# Altium PCB PCB1.PcbDoc
Units mm, origin at the board's own origin, x right, y up, seen from the top; angles counter-clockwise.
Board outline 34.5 x 33.25 mm, 4 copper layers (SIGNAL 1, Int1 (GND), Int2 (GND), SIGNAL 2), stack 1.57 mm thick; 35 components, 28 nets, 169 pads, 124 vias.
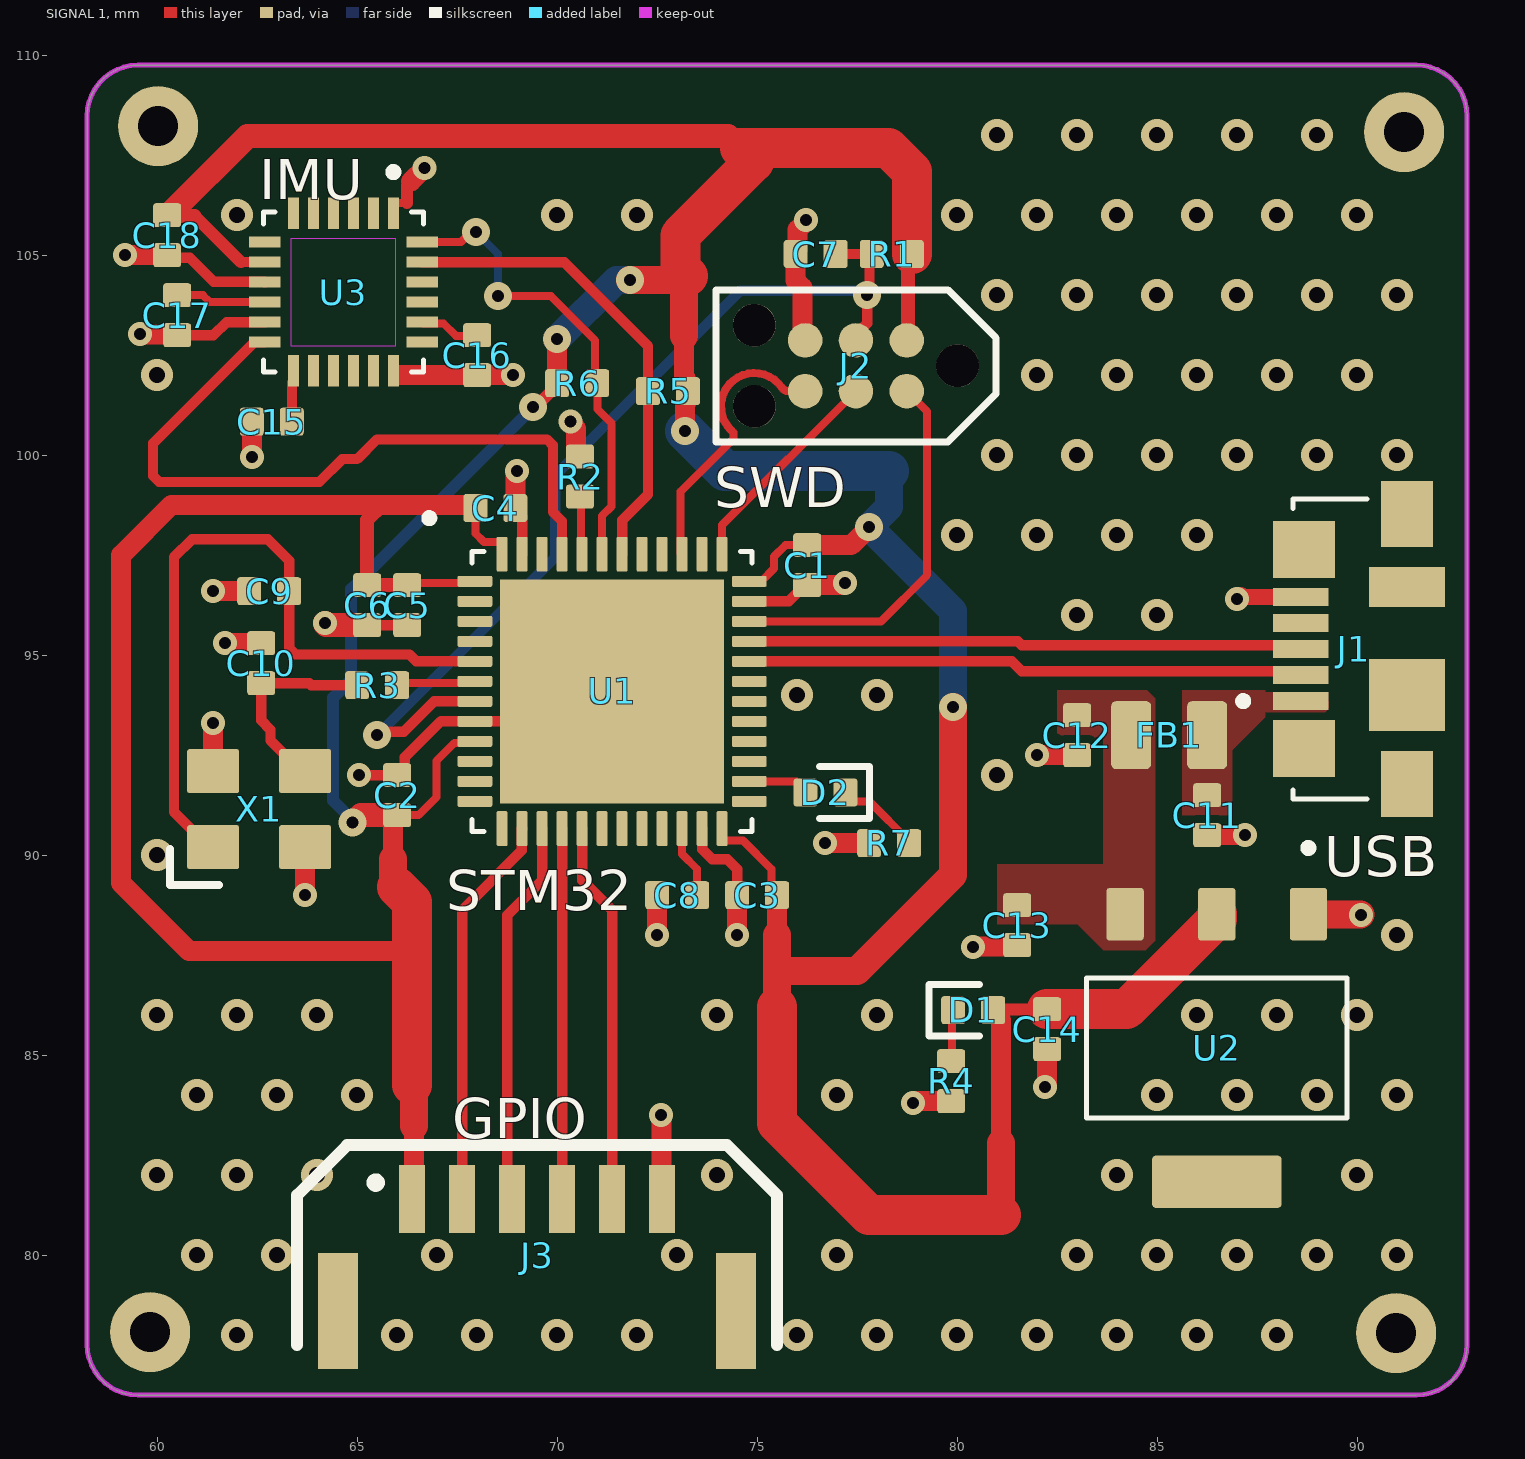
[diagram p0: SIGNAL 1 view]
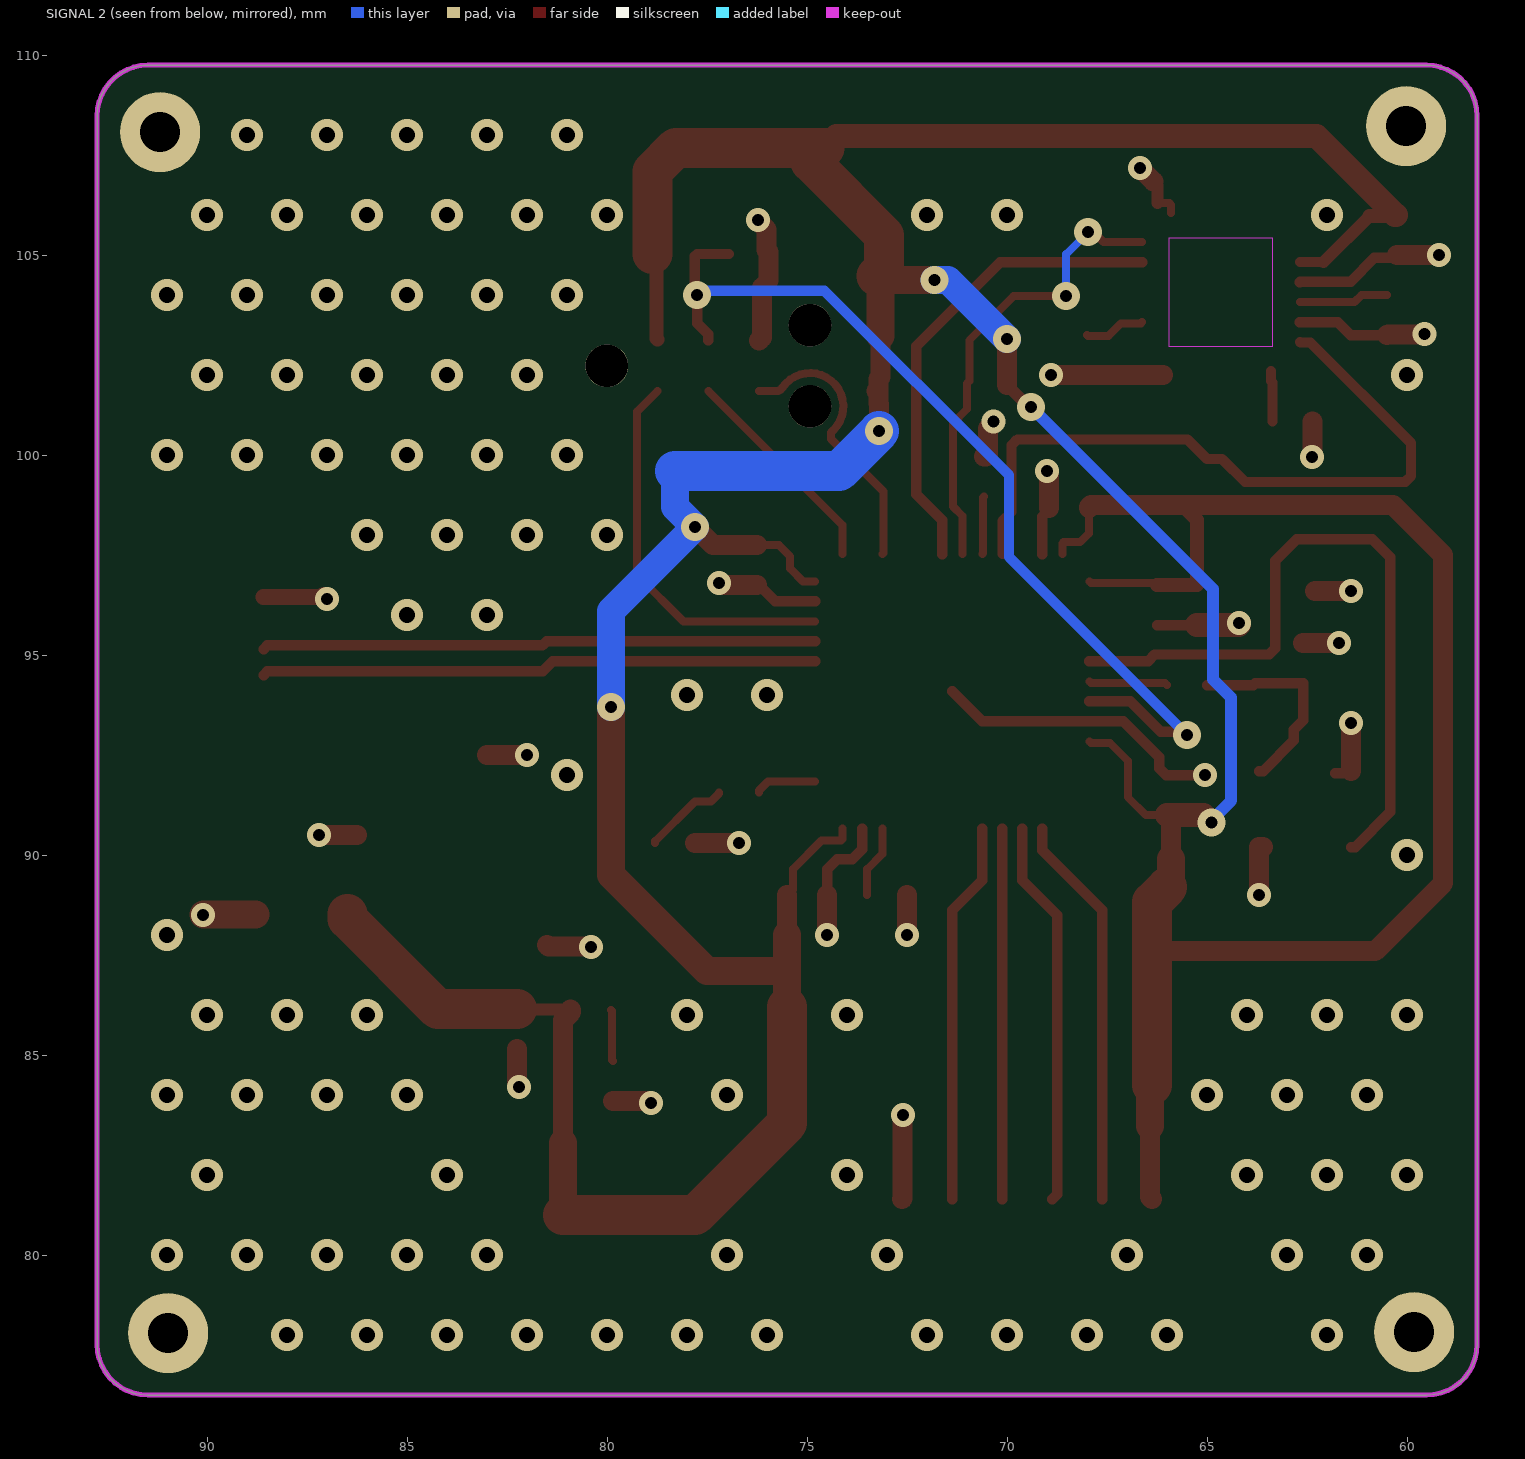
[diagram p1: SIGNAL 2 view, seen from below]
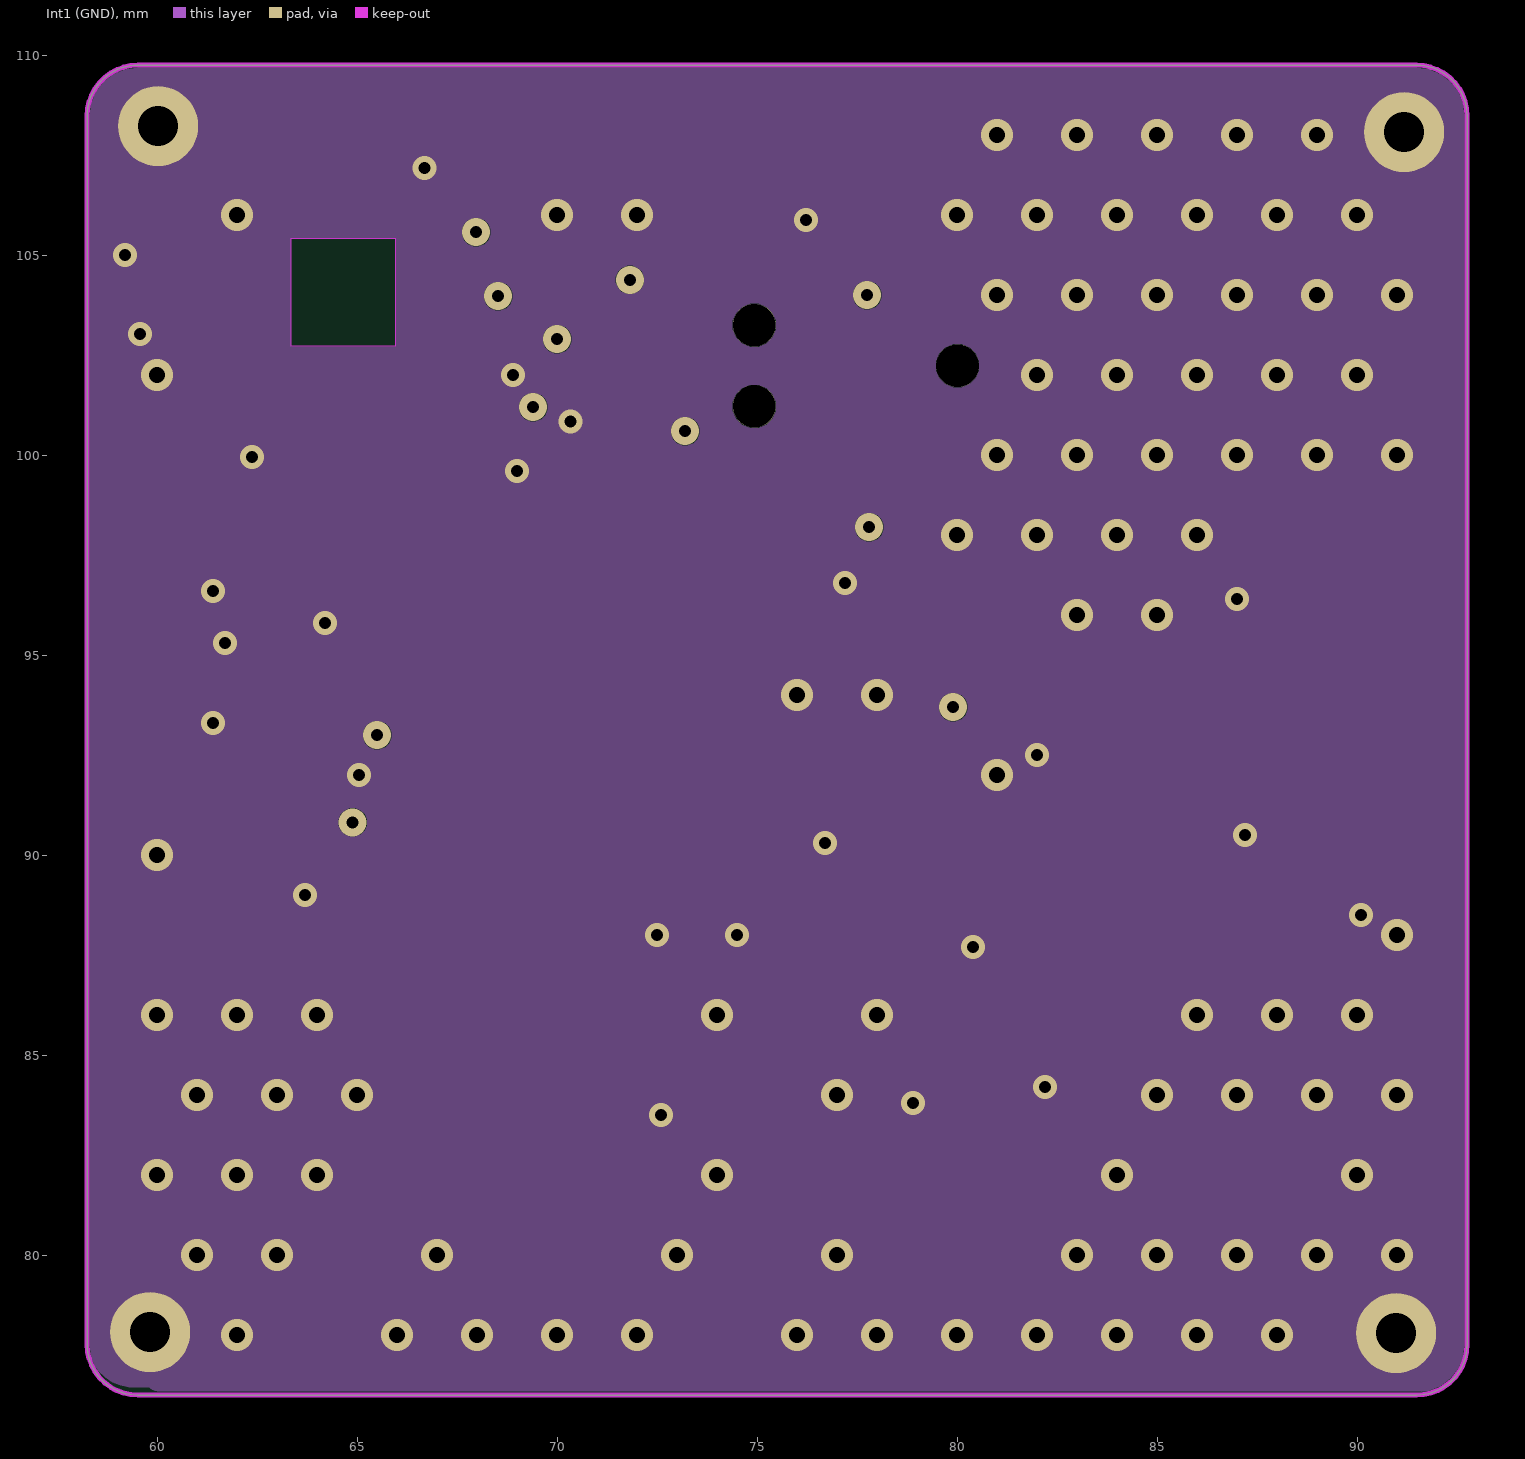
[diagram p2: Int1 (GND)]
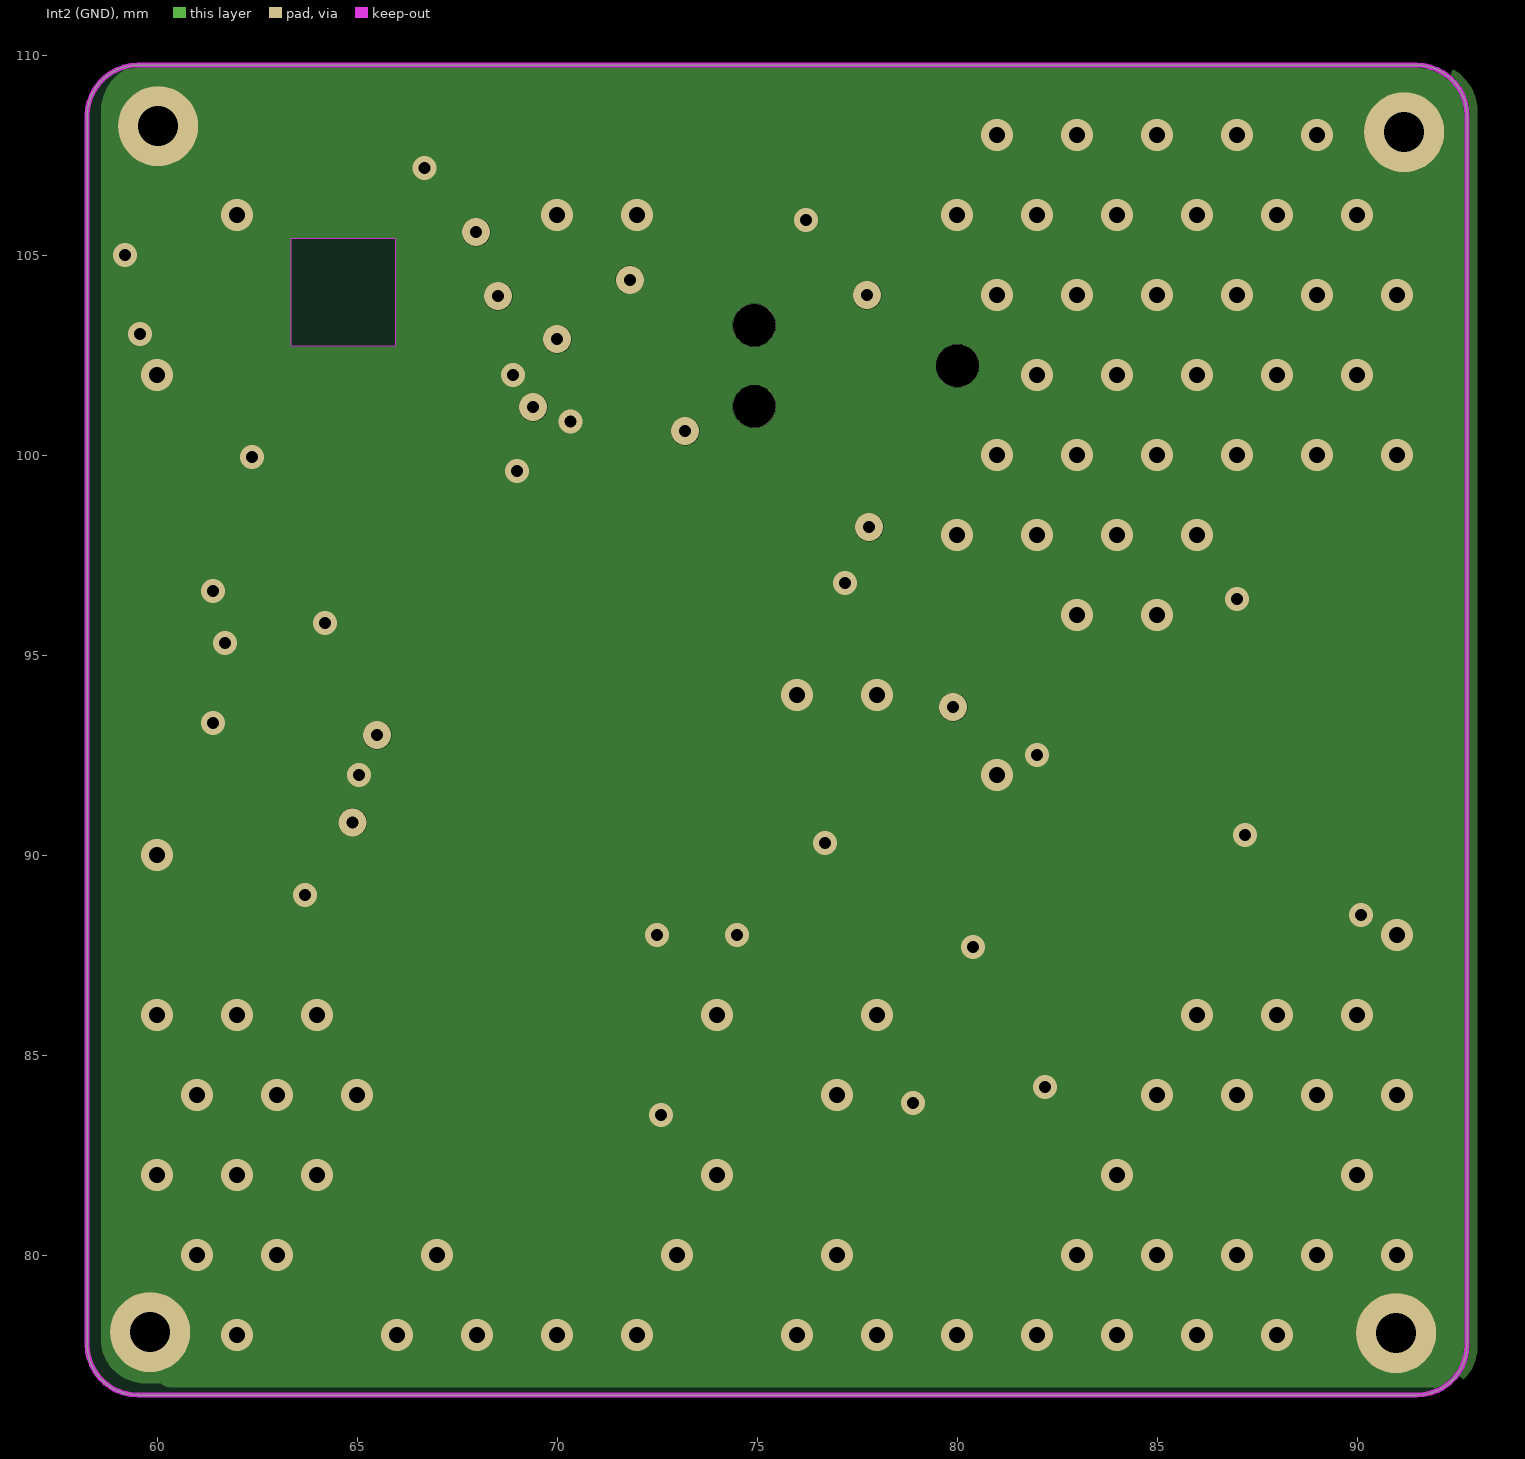
[diagram p3: Int2 (GND)]
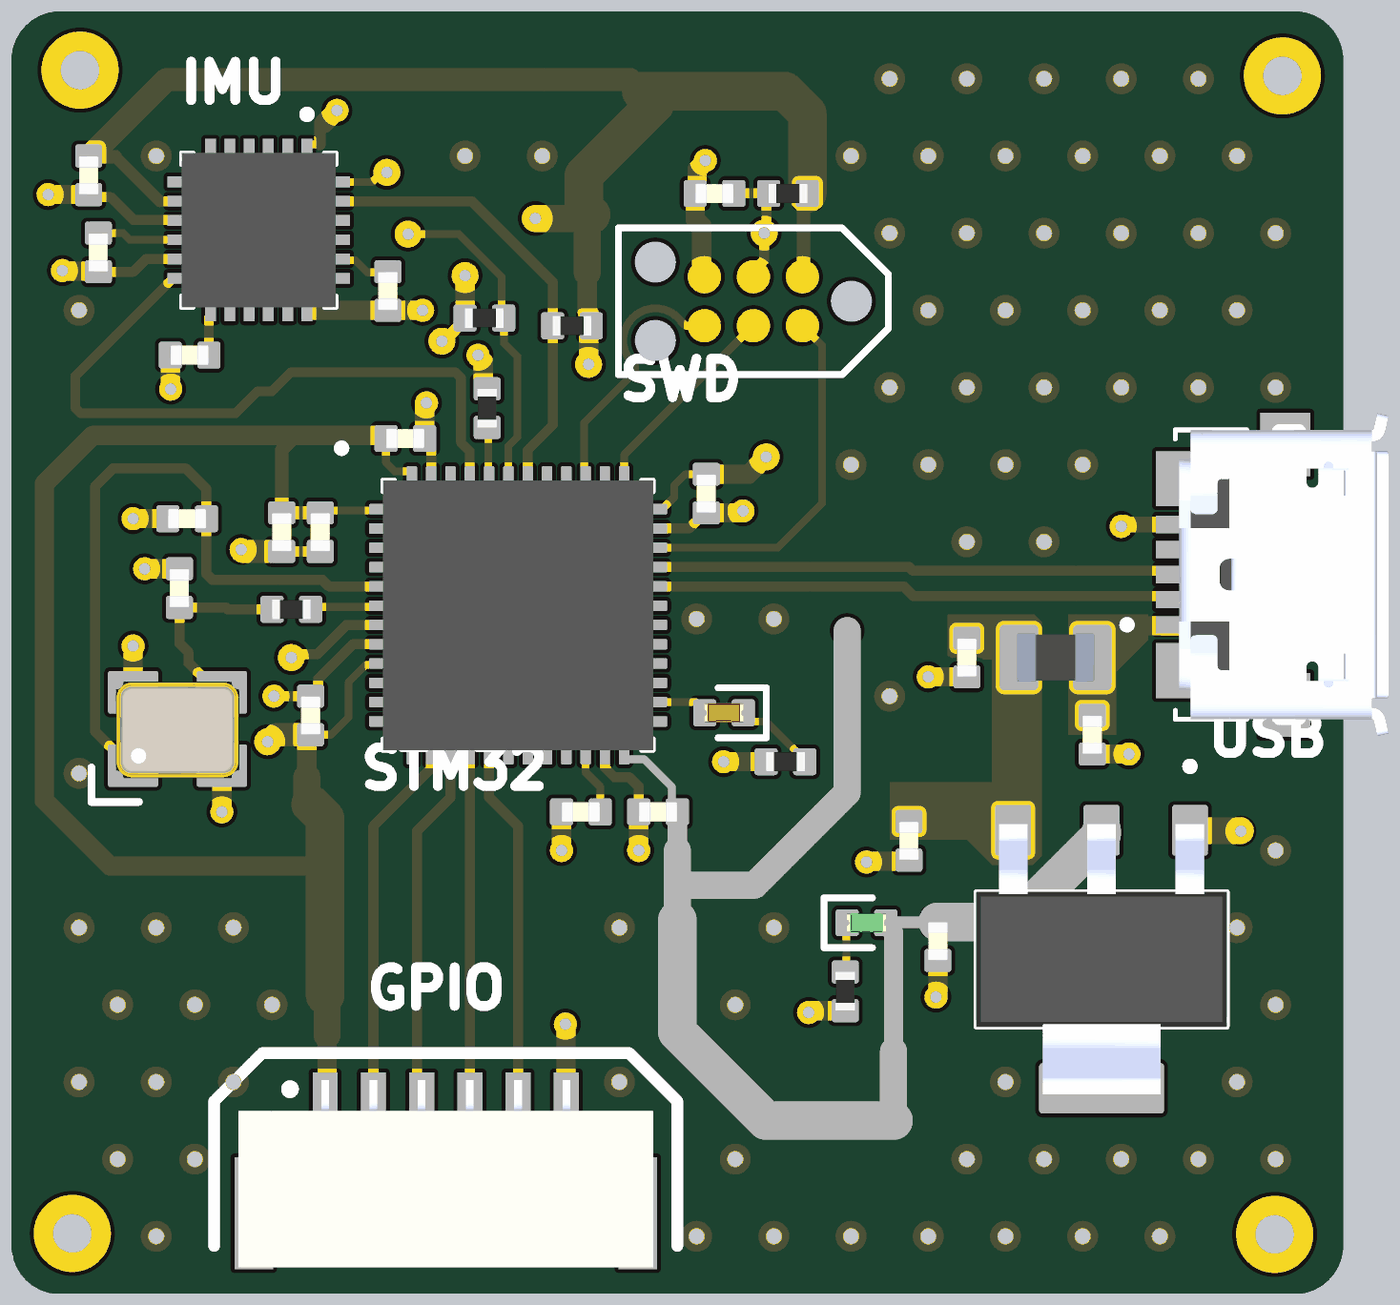
[diagram p4: 3D render of the assembled board from above, using the file's embedded part models]

## Layer stack, top to bottom
Top Solder: solder mask 0.0254, SM-001, Dk 4
SIGNAL 1: signal copper 0.035
Dielectric 2: prepreg 0.2, PP-017, Dk 4.6
Int1 (GND): signal copper 0.0175
Dielectric 3: core 1.065, Core-039, Dk 4.6
Int2 (GND): signal copper 0.0175
Dielectric 4: prepreg 0.2, PP-017, Dk 4.6
SIGNAL 2: signal copper 0.035
Bottom Solder: solder mask 0.0254, SM-001, Dk 4

## Board outline
58.25,77.77 58.25,108.48 cw(c59.52,108.48) 59.52,109.75 91.48,109.75 cw(c91.48,108.48) 92.75,108.48 92.75,77.77 cw(c91.48,77.77) 91.48,76.5 59.52,76.5 cw(c59.52,77.77)

## Design rules (kind name [scope] priority, off if disabled: settings)
Clearance [All] p1: gap=0.001 ignorepadtopadclearanceinfootprint=FALSE
DiffPairsRouting [All] p1: maxlimit=0.254 minlimit=0.203 mostfreqgap=0.254 toplayer_maxgap=0.203 toplayer_prefgap=0.203 toplayer_minwidth=0.26 toplayer_maxwidth=0.26 toplayer_prefwidth=0.26 bottomlayer_maxgap=0.203 bottomlayer_prefgap=0.203 bottomlayer_minwidth=0.26 bottomlayer_maxwidth=0.26 bottomlayer_prefwidth=0.26 impedanceprofiledriven=TRUE impedanceprofileid={E10362C9-FD98-41E2-AF1A-DACD84C4998A} impedanceprofilevalue=90.000000 maxuncoupledlength=12.7
PolygonConnect [All] p1: connectstyle=Direct reliefconductorwidth=0.254 reliefentries=4 polygonreliefangle="90 Angle" airgapwidth=0.254
RoutingVias [All] p1: holewidth=0.3 width=0.7 viastyle="Through Hole" minholewidth=0.25 minwidth=0.55 maxholewidth=0.4 maxwidth=0.9
SolderMaskExpansion [All] p1: expansion=0.102 istentingtop=FALSE
UnRoutedNet [All] p1: checkbadconnections=TRUE
Width [All] p1: maxlimit=1 minlimit=0.01 preferedwidth=0.01 midlayer1_maxwidth=0.01 midlayer2_maxwidth=0.01 minimp=50.000000 maximp=50.000000 favimp=50.000000
28 further rules are at their usual default settings.

## Classes and differential pairs
differential pair class DIFF_USB: USB_D
differential pair USB_D: +USB_D_P -USB_D_N

## Components (designator, comment, footprint, x,y, rotation, side; value= is the part's Value field where it differs from the comment)
C1 "100n" CAP_0402 76.25,97.25 r90 top
C2 "100n" CAP_0402 66,91.5 r270 top
C3 "100n" CAP_0402 75,89 r0 top
C4 "100n" CAP_0402 68.453,98.679 r180 top
C5 "100n" CAP_0402 66.25,96.25 r90 top
C6 "2u2" CAP_0402 65.25,96.25 r90 top
C7 "100n" CAP_0402 76.462,105.029 r0 top
C8 "2u2" CAP_0402 73,89 r0 top
C9 "10p" CAP_0402 62.8,96.6 r0 top
C10 "10p" CAP_0402 62.6,94.8 r270 top
C11 "2u2" CAP_0402 86.25,91 r270 top
C12 "2u2" CAP_0402 83,93 r270 top
C13 "22u" CAP_0402 81.5,88.25 r90 top
C14 "22u" CAP_0402 82.25,85.65 r90 top
C15 "100n" CAP_0402 62.865,100.838 r0 top
C16 "100n" CAP_0402 68,102.5 r90 top
C17 "10n" CAP_0402 60.5,103.5 r90 top
C18 "2n2" CAP_0402 60.25,105.5 r90 top
D1 "GREEN" LED_0402_GREEN 80.4,86.125 r180 top
D2 "RED" LED_0402_RED 76.708,91.567 r0 top
FB1 "120R" FB_0805 85.3,93 r180 top
J1 "47346-0001" MOLEX_47346-0001 91.25,95.15 r90 top
J2 "TC2030-NL" TC2030-NL-FP 77.47,102.235 r180 top
J3 "SM06B-GHS-TB" SM06B-GHS-TB 69.5,80 r0 top
R1 "10k" RES_0402 78.367,105.029 r0 top
R2 "10k" RES_0402 70.573,99.465 r270 top
R3 "0R" RES_0402 65.5,94.25 r0 top
R4 "1k" RES_0402 79.85,84.35 r90 top
R5 "2K2" RES_0402 72.771,101.6 r0 top
R6 "2K2" RES_0402 70.5,101.8 r180 top
R7 "R0402" RES_0402 78.3,90.3 r180 top
U1 "STM32F411CEU6" QFN50P700X700X60-49N 71.373,94.095 r0 top
U2 "AMS1117-3.3" SOT229P700X180-4N 86.49,85.18 r270 top
U3 "MPU-6050" QFN50P400X400X95-24N 64.655,104.078 r270 top
X1 "24MHz" XTAL_3225 62.55,91.15 r0 top

## Footprints (in the part's own frame and the unit in brackets; to place one, negate y for a bottom-side part, rotate by r counter-clockwise, add the part's x,y. Pads: shape width x height; smd on the part's side, far side on the other; paste and mask are expansions set on the pad)
CAP_0402 [mm]
  rrect25% 0.6x0.7 smd: 1(-0.5,0) 2(0.5,0)
  body extent -0.5,-0.26 0.5,0.26, height 0.37
FB_0805 [mm]
  rrect25% 1x1.7 smd: 1(-0.95,0) 2(0.95,0)
  body extent -1,-0.63 1,0.63, height 0.86
LED_0402_GREEN [mm]
  rrect25% 0.6x0.7 smd: A(-0.5,0) K(0.5,0)
  silkscreen extent -0.15,-0.65 1.1,0.65, body extent -0.51,-0.25 0.51,0.25, height 0.45
LED_0402_RED [mm]
  rrect25% 0.6x0.7 smd: A(-0.5,0) K(0.5,0)
  silkscreen extent -0.15,-0.65 1.1,0.65, body extent -0.51,-0.25 0.51,0.25, height 0.45
MOLEX_47346-0001 [mm]
  rect 0.45x1.38 smd: 1(-1.3,2.66) 2(-0.65,2.66) 3(0,2.66) 4(0.65,2.66) 5(1.3,2.66)
  rect 1.425x1.55 smd: S1(-2.488,2.575) S2(2.488,2.575)
  rect 1.65x1.3 smd: S3(-3.375,0) S6(3.375,0)
  rect 1.8x1.9 smd: S4(-1.15,0)
  rect 1x1.9 smd: S5(1.55,0)
  silkscreen extent -3.75,1 3.75,4.2, body extent -4.18,-2.68 4.18,2.75, height 2.71
QFN50P400X400X95-24N [mm]
  rect 0.79x0.28 smd: 1(-1.97,1.25) 2(-1.97,0.75) 3(-1.97,0.25) 4(-1.97,-0.25) 5(-1.97,-0.75) 6(-1.97,-1.25) 13(1.97,-1.25) 14(1.97,-0.75) 15(1.97,-0.25) 16(1.97,0.25) 17(1.97,0.75) 18(1.97,1.25)
  rect 0.28x0.79 smd: 7(-1.25,-1.97) 8(-0.75,-1.97) 9(-0.25,-1.97) 10(0.25,-1.97) 11(0.75,-1.97) 12(1.25,-1.97) 19(1.25,1.97) 20(0.75,1.97) 21(0.25,1.97) 22(-0.25,1.97) 23(-0.75,1.97) 24(-1.25,1.97)
  Keep-Out Layer region: 1.35,-1.3 -1.35,-1.3 -1.35,1.3 1.35,1.3
  silkscreen extent -3.1,-2 2,2, body extent -2,-2 2,2, height 0.93
QFN50P700X700X60-49N [mm]
  rrect25% 0.87x0.27 smd: 1(-3.43,2.75) 2(-3.43,2.25) 3(-3.43,1.75) 4(-3.43,1.25) 5(-3.43,0.75) 6(-3.43,0.25) 7(-3.43,-0.25) 8(-3.43,-0.75) 9(-3.43,-1.25) 10(-3.43,-1.75) 11(-3.43,-2.25) 12(-3.43,-2.75) 25(3.43,-2.75) 26(3.43,-2.25) 27(3.43,-1.75) 28(3.43,-1.25) 29(3.43,-0.75) 30(3.43,-0.25) 31(3.43,0.25) 32(3.43,0.75) 33(3.43,1.25) 34(3.43,1.75) 35(3.43,2.25) 36(3.43,2.75)
  rrect25% 0.27x0.87 smd: 13(-2.75,-3.43) 14(-2.25,-3.43) 15(-1.75,-3.43) 16(-1.25,-3.43) 17(-0.75,-3.43) 18(-0.25,-3.43) 19(0.25,-3.43) 20(0.75,-3.43) 21(1.25,-3.43) 22(1.75,-3.43) 23(2.25,-3.43) 24(2.75,-3.43) 37(2.75,3.43) 38(2.25,3.43) 39(1.75,3.43) 40(1.25,3.43) 41(0.75,3.43) 42(0.25,3.43) 43(-0.25,3.43) 44(-0.75,3.43) 45(-1.25,3.43) 46(-1.75,3.43) 47(-2.25,3.43) 48(-2.75,3.43)
  rect 5.6x5.6 smd paste-4: 49(0,0)
  silkscreen extent -4.67,-3.5 3.5,4.43, body extent -3.5,-3.5 3.5,3.5, height 0.61
RES_0402 [mm]
  rrect25% 0.6x0.7 smd: 1(-0.5,0) 2(0.5,0)
  body extent -0.5,-0.25 0.5,0.25, height 0.3
SM06B-GHS-TB [mm]
  rect 0.65x1.7 smd: 1(-3.125,1.4) 2(-1.875,1.4) 3(-0.625,1.4) 4(0.625,1.4) 5(1.875,1.4) 6(3.125,1.4)
  rect 1x2.9 smd: ""(-4.975,-1.4) ""(4.975,-1.4)
  silkscreen extent -6,-2.25 6,2.75, body extent -5.38,-2.8 5.38,2.05, height 4.26
SOT229P700X180-4N [mm]
  rrect15% 1.31x0.93 smd: 1(-3.345,2.29) 2(-3.345,0) 3(-3.345,-2.29)
  rrect15% 1.31x3.24 smd: 4(3.345,0)
  silkscreen extent -5.1,-3.25 1.75,3.25, body extent -3.5,-3.25 3.5,3.25, height 1.8
TC2030-NL-FP [mil]
  round 33.98 smd paste-16.99: 1(-50,-25) 2(-50,25) 3(0,-25) 4(0,25) 5(50,-25) 6(50,25)
  round 42.01 hole 42.01 unplated: MH(-100,0) MH(100,-40) MH(100,40)
  silkscreen extent -138,-75 138,75
XTAL_3225 [mm]
  rrect10% 1.3x1.1 smd: 1(-1.15,-0.95) 2(1.15,-0.95) 3(1.15,0.95) 4(-1.15,0.95)
  silkscreen extent -2.23,-1.89 -1,-1, body extent -1.6,-1.28 1.6,1.22, height 0.61

## Part data
C1 C2 C3 C4 C5 C6 C7 C8 C9 C10 C11 C12 C13 C14 C15 C16 C17 C18: library part CAP_0402, "Capacitor SMD 0402"
D1: library part LED_0402_GREEN, "LED 0402 GREEN SMD"
D2: library part LED_0402_RED, "LED 0402 RED SMD"
FB1: library part FB_0805, "Ferrite Bead SMD 0805"
J1: "Conn Data USB Micro B w/Flange SMT Bottom Mnt LF", Package=None, Check_prices=https://www.snapeda.com/parts/47346-0001/Molex/view-part/?ref=eda, MF=Molex, MP=47346-0001, SnapEDA_Link=https://www.snapeda.com/parts/47346-0001/Molex/view-part/?ref=snap
J2: "Tag-Connect No-Solder SWD Debug Connector (No Legs) DO NOT PLACE", Manufacturer=Tag-Connect, Manufacturer Part Number=TC2030-NL-FP
J3: "Header Connector 6 Position 1.25MM Pitch SMD Horizontal JST GH", Manufacturer=JST, Manufacturer Part Number=SM06B-GHS-TB
R1 R2 R3 R4 R5 R6 R7: library part RES_0402, "Resistor SMD 0402"
U1: "High-performance access line, ARM Cortex-M4 core with DSP and FPU, 512 Kbytes Flash, 100 MHz CPU, ART Accelerator", Package=None, Availability=Unavailable, MP=STM32F411CEU6, Price=None
U2: "Sot223/Pkg 1-Amp 3.3-Volt Low Drop Out Voltage Regulatator", Package="SOT-223 Seeed Technology", Availability="Not in stock", Check_prices=https://www.snapeda.com/parts/AMS1117-3.3/Advanced+Monolithic+Systems/view-part/?ref=eda, MF="Advanced Monolithic Systems", MP=AMS1117-3.3, Price=None, SnapEDA_Link=https://www.snapeda.com/parts/AMS1117-3.3/Advanced+Monolithic+Systems/view-part/?ref=snap
U3: "MPU-6050 series Accelerometer, Gyroscope, 3 Axis Sensor Evaluation Board", Package="QFN-24 InvenSense", Check_prices=https://www.snapeda.com/parts/MPU-6050/TDK+InvenSense/view-part/?ref=eda, MF="TDK InvenSense", MP=MPU-6050, SnapEDA_Link=https://www.snapeda.com/parts/MPU-6050/TDK+InvenSense/view-part/?ref=snap
X1: library part TSX-3225_24.0000MF15X-AC, "Crystal SMD 24MHz 10PPM 7pF 3225", Manufacturer=Epson, Manufacturer Part Number="TSX-3225 24.0000MF15X-AC"

## Free pads (board coordinates)
  round 2 hole 1: MH(59.825,78.075) MH(60.025,108.225) MH(90.975,78.05) MH(91.175,108.075)

## Via types
v1: diameter 0.8, hole 0.4, SIGNAL 1 to SIGNAL 2, 87 vias
v2: diameter 0.6, hole 0.3, SIGNAL 1 to SIGNAL 2, 26 vias
v3: diameter 0.7, hole 0.3, SIGNAL 1 to SIGNAL 2, 11 vias

## Nets (pads, with @x,y where several pads share a name; then routed paths per layer and width w, separated by ;. In a path a pad name is that pad's centre, name@x,y a point inside that pad or via, vN(x,y) a via of type N, cw(c..) or ccw(c..) an arc to the next point about the centre after c; other vN are vias at no path point)
+3V3: C1.2 C2.2 C3.2 C4.2 C5.2 C6.2 C14.2 C18.2 D1.A J2.1 J3.1 R1.2 R5.2 R6.2 U1.1 U1.9 U1.24 U1.36 U1.48 U2.2 U3.8 | length 151.9
  SIGNAL 1 w0.2: C2.2 66.533,91 66.983,91.45 66.983,92.36 67.434,92.81 67.908,92.81 U1.9 ; C5.2 66.31,96.81 67.908,96.81 U1.1 ; C4.2@67.953,98.65 67.953,98.047 68.174,97.826 68.588,97.826 68.623,97.791 U1.48 ; U1.24 74.123,90.399 74.158,90.364 74.643,90.364 75.357,89.65 75.357,89.143 C3.2 ; U1.36 75.103,96.845 75.423,97.165 75.423,97.465 75.708,97.75 C1.2 ; C14.2@82.238,86.138 C14.2
  SIGNAL 1 w0.25: 62.096,104.824 U3.8@62.681,104.824
  SIGNAL 1 w0.3: 60.939,105.981 62.096,104.824 ; v3(69.4,101.2) 69.45,101.2 R6.2@70,101.75 ; D1.A@80.913,86.138 C14.2@82.238,86.138
  SIGNAL 1 w0.35: C18.2@60.269,105.981 60.939,105.981 ; 65.634,98.758 65.25,98.374 C6.2 C5.2 ; J2.1@78.74,102.886 78.768,102.914 78.768,104.946 R1.2@78.851,105.029
  SIGNAL 1 w0.5: 65.9,89.9 65.9,90.95 C2.2@65.95,91 ; J3.1 66.425,81.45 66.425,83.225 ; 66.375,87.6 60.8,87.6 59.1,89.3 59.1,97.5 60.358,98.758 65.634,98.758 67.903,98.758 67.953,98.708 C4.2 ; R6.2@70,101.75 R6.2 v3(70,102.9) ; 73.164,102.981 73.164,101.959 73.221,101.903 73.221,101.65 R5.2 ; v3@73.2,100.616 73.2,101.276 73.221,101.297 73.221,101.566 R5.2@73.255,101.6 ; 75.5,88 C3.2 ; C1.2 77.35,97.75 v3(77.8,98.2) ; D1.A@80.913,86.138 D1.A 80.9,86.075 81.1,85.875 81.1,82.8
  SIGNAL 1 w0.6: C18.2@60.284,106 60.3,106 60.3,106.016 62.264,107.981 74.265,107.981 74.564,107.681 ; v3(64.887,90.818) 64.914,90.818 65.096,91 65.95,91 C2.2
  SIGNAL 1 w0.7: 65.9,89.9 65.9,89.3 66,89.2 ; 66.375,84.25 66.425,84.2 66.425,83.225 ; v3(71.819,104.381) 73.164,104.381 ; 73.164,102.981 73.164,104.381 ; 73.264,104.481 73.164,104.381 ; 75.5,86.2 75.5,87.1 ; 75.5,88 75.5,87.1 ; v3(79.9,93.7) 79.9,89.5 77.5,87.1 75.5,87.1 ; 81.1,81 81.1,82.8
  SIGNAL 1 w1: 66,89.2 66.375,88.825 66.375,87.6 66.375,84.25 ; 73.264,104.481 73.079,104.667 73.079,105.495 74.915,107.331 ; 74.564,107.681 78.281,107.681 78.867,107.095 R1.2 ; 75.5,86.2 75.5,83.3 77.8,81 81.1,81 ; C14.2 84.235,86.15 86.49,88.405 U2.2
  SIGNAL 2 w0.3: v3(64.887,90.818) 64.887,90.875 64.4,91.362 64.4,93.936 64.85,94.386 64.85,96.65 v3(69.4,101.2)
  SIGNAL 2 w0.7: v3(70,102.9) 71.481,104.381 v3(71.819,104.381) ; 78.3,99.6 78.3,98.7 v3(77.8,98.2) 79.9,96.1 v3(79.9,93.7)
  SIGNAL 2 w1: v3(73.2,100.6) 74.2,99.6 78.3,99.6
+5: C12.1 C13.2 FB1.2 U2.3
GND: C1.1 C2.1 C3.1 C4.1 C5.1 C6.1 C7.1 C8.1 C9.1 C10.1 C11.2 C12.2 C13.1 C14.1 C15.1 C16.1 C17.1 C18.1 J1.5 J2.5 J3.6 pad.MH R2.1 R4.1 R7.2 U1.8 U1.23 U1.35 U1.47 U1.49 U2.1 U3.1 U3.9 U3.11 U3.18 X1.2 X1.4 | length 50.6
  SIGNAL 1 w0.2: U3.1 65.905,106.26 65.945,106.3 66.24,106.3
  SIGNAL 1 w0.26: C18.1 60.319,104.931 60.819,104.931 61.412,104.338 62.675,104.338 U3.9 ; C17.1 61.406,103 61.734,103.328 U3.11 ; X1.4 61.452,92.048 X1.4@61.8,92.048 ; C9.1@62.3,96.55 C9.1 ; v2(65.05,92) 66.024,92 66.194,92.17 66.194,92.444 67.095,93.345 U1.8 70.623,93.345 U1.49 ; C6.1 C5.1 ; U1.47 C4.1@69.123,98.459 ; U1.23 73.628,90.66 73.628,90.143 73.874,89.896 74.253,89.896 74.5,89.65 C3.1 ; U1.35 75.795,96.345 76.2,96.75 C1.1
  SIGNAL 1 w0.3: 66.24,106.3 66.24,106.74 66.34,106.84
  SIGNAL 1 w0.4: v2@87.077,96.45 J1.5
  SIGNAL 1 w0.5: v2(59.2,105) C18.1 ; v2(59.568,103.03) 59.583,103.015 60.485,103.015 C17.1 ; X1.4 v2(61.4,93.3) ; v2(61.4,96.6) C9.1 ; v2(61.7,95.3) C10.1 ; C15.1 62.369,100.834 62.369,99.962 v2(62.374,99.958) ; X1.2@63.6,90.2 X1.2 v2(63.7,89) ; 66.1,102 C16.1 v2(68.9,102) ; 66.34,106.84 v2(66.681,107.181) ; C4.1 68.953,99.526 69,99.573 v2(69,99.6) ; v2(70.336,100.836) 70.336,100.809 70.473,100.672 70.473,100.015 70.523,99.965 R2.1 ; v2(72.5,88) C8.1 ; v2(72.6,83.5) 72.613,83.487 72.613,81.412 J3.6 ; v2(74.5,88) C3.1 ; C7.1 75.962,104.362 76.131,104.193 76.131,102.939 J2.5 ; C7.1 75.962,105.079 76.012,105.129 76.012,105.642 76.225,105.855 v2(76.225,105.882) ; C1.1 77.123,96.75 77.173,96.8 v2(77.2,96.8) ; v2(76.7,90.3) R7.2 ; v2(78.9,83.8) 78.927,83.8 78.977,83.85 R4.1 ; v2(80.4,87.7) 80.419,87.719 81.469,87.719 C13.1 ; v2(82,92.5) C12.2 ; v2(82.2,84.2) 82.2,84.227 82.25,84.277 C14.1 ; C11.2 v2(87.2,90.5) ; v2(87,96.4) 87.027,96.4 v2@87.077,96.45 ; U2.1 U2.1@88.792,88.513 ; v2@90.088,88.513 v2(90.1,88.5)
  SIGNAL 1 w0.6: v2(64.2,95.8) ccw(c64.25,95.8) 64.25,95.75 C6.1
  SIGNAL 1 w0.7: U2.1@88.792,88.513 v2@90.088,88.513
  other v1: 62,78 66,78 68,78 70,78 72,78 76,78 78,78 80,78 82,78 84,78 86,78 88,78 61,80 63,80 67,80 73,80 77,80 83,80 85,80 87,80 89,80 91,80 60,82 62,82 64,82 74,82 84,82 90,82 61,84 63,84 65,84 77,84 85,84 87,84 89,84 91,84 60,86 62,86 64,86 74,86 78,86 86,86 88,86 90,86 91,88 60,90 81,92 76,94 78,94 83,96 85,96 80,98 82,98 84,98 86,98 81,100 83,100 85,100 87,100 89,100 91,100 60,102 82,102 84,102 86,102 88,102 90,102 81,104 83,104 85,104 87,104 89,104 91,104 62,106 70,106 72,106 80,106 82,106 84,106 86,106 88,106 90,106 81,108 83,108 85,108 87,108 89,108
IMU_CPOUT: C16.2 U3.20 | length 1.5
  SIGNAL 1 w0.2: U3.20 66.655,103.298 67.154,103.298 67.467,102.984 67.984,102.984 C16.2
IMU_INT: U1.45 U3.12 | length 18
  SIGNAL 1 w0.25: U3.12 62.67,102.813 62.415,102.813 59.9,100.298 59.9,99.479 60.046,99.333 64.058,99.333 64.625,99.9 65,99.9 65.496,100.396 69.746,100.396 69.892,100.25 69.892,98.58 70.123,98.35 U1.45
IMU_REGOUT: C17.2 U3.10 | length 2.3
  SIGNAL 1 w0.2: C17.2 61.142,104 61.314,103.828 U3.10
IMU_SCL: R5.1 U1.42 U3.23 | length 12
  SIGNAL 1 w0.26: U3.23 70.172,104.828 72.271,102.729 R5.1 ; U1.42 71.623,98.377 72.271,99.025 R5.1@72.271,101.65
IMU_SDA: R6.1 U1.43 U3.24 | length 11.8
  SIGNAL 1 w0.2: U3.24 67.593,105.328 67.84,105.575 v3(67.975,105.575) ; v3(68.525,103.975) 69.844,103.975 70.948,102.871 70.948,101.852 71.008,101.792 71.008,101.15 71.358,100.8 71.358,98.72 71.123,98.485 U1.43
  SIGNAL 2 w0.2: v3(67.975,105.575) 68.525,105.025 v3(68.525,103.975)
LED-CATH: D1.K R4.2 | length 1.3
  SIGNAL 1 w0.2: R4.2 79.875,84.875 79.875,86.1 D1.K
MCU_BOOT0: R2.2 U1.44 | length 1.5
  SIGNAL 1 w0.2: R2.2 70.598,98.94 70.598,97.55 U1.44
MCU_LED_A: D2.A U1.26 | length 1.5
  SIGNAL 1 w0.2: U1.26 75.98,91.845 76.208,91.617 D2.A
MCU_LED_K: D2.K R7.1 | length 2.2
  SIGNAL 1 w0.2: D2.K 77.208,91.542 77.408,91.342 77.808,91.342 78.8,90.35 R7.1
MCU_NRST: C7.2 J2.3 R1.1 U1.7 | length 24
  SIGNAL 1 w0.26: v3(65.5,93) 65.584,93.084 66.165,93.084 66.926,93.845 U1.7 ; C7.2 77.75,105.029 77.808,104.97 77.808,104.058 v3(77.75,104) 77.75,103.301 77.47,103.021 J2.3
  SIGNAL 2 w0.26: v3(65.5,93) 69.953,97.453 69.953,99.496 74.572,104.115 77.516,104.115 77.631,104 v3(77.75,104)
MCU_OSC_IN: C9.2 U1.5 X1.1 | length 18
  SIGNAL 1 w0.26: X1.1 61.3,90.2 60.42,91.08 60.42,97.448 60.872,97.9 62.761,97.9 63.3,97.361 C9.2 63.3,95.169 63.452,95.017 66.306,95.017 66.478,94.845 U1.5
MCU_OSC_OUT: R3.2 U1.6 | length 2
  SIGNAL 1 w0.2: R3.2 66.06,94.31 67.908,94.31 U1.6
MCU_PA4: J3.2 U1.14 | length 9.9
  SIGNAL 1 w0.26: J3.2 67.625,88.625 69.118,90.118 69.118,90.66 U1.14
MCU_PA5: J3.3 U1.15 | length 9.7
  SIGNAL 1 w0.26: J3.3 68.75,81.525 68.75,88.5 69.623,89.373 U1.15
MCU_PA6: J3.4 U1.16 | length 9.3
  SIGNAL 1 w0.26: U1.16 70.124,90.664 70.124,81.401 J3.4
MCU_PA7: J3.5 U1.17 | length 9.6
  SIGNAL 1 w0.26: U1.17 70.623,89.377 71.375,88.625 J3.5
MCU_SWCLK: J2.4 U1.37 | length 5.5
  SIGNAL 1 w0.2: U1.37 74.123,98.253 J2.4
MCU_SWDIO: J2.2 U1.34 | length 9.7
  SIGNAL 1 w0.2: U1.34 78.095,95.845 79.25,97 79.25,101.09 J2.2
MCU_SWO: J2.6 U1.39 | length 7.1
  SIGNAL 1 w0.2: U1.39 73.088,97.56 73.088,99.088 74.402,100.402 74.402,100.484 ccw(c74.202,100.485) 74.402,100.486 74.402,100.568 74.344,100.626 cw(c74.93,101.219) 75.62,101.686 ccw(c75.785,101.8) 75.679,101.63 75.728,101.6 75.785,101.6 J2.6
MCU_VCAP1: C8.2 U1.22 | length 1.8
  SIGNAL 1 w0.2: U1.22 73.123,90.027 73.5,89.65 C8.2
NetC15_2: C15.2 U3.13 | length 1.3
  SIGNAL 1 w0.25: C15.2 63.365,101.813 63.405,101.853 U3.13
USB_D_N: J1.2 U1.32 | length 13.9
  SIGNAL 1 w0.26: U1.32 81.361,94.845 81.611,94.595 88.495,94.595 J1.2
USB_D_P: J1.3 U1.33 | length 13.9
  SIGNAL 1 w0.26: U1.33 81.516,95.345 81.617,95.245 88.495,95.245 J1.3
Vbus: C11.1 FB1.1 J1.1
XIN: C10.2 R3.1 X1.3 | length 5.1
  SIGNAL 1 w0.26: X1.3 63.6,92.1 62.832,92.868 62.832,93.136 62.6,93.368 C10.2 63.8,94.3 63.85,94.25 R3.1
pads on no net: J1.4 J1.S1 J1.S2 J1.S3 J1.S4 J1.S5 J1.S6 J2.MH J3. U1.2 U1.3 U1.4 U1.10 U1.11 U1.12 U1.13 U1.18 U1.19 U1.20 U1.21 U1.25 U1.27 U1.28 U1.29 U1.30 U1.31 U1.38 U1.40 U1.41 U1.46 U2.4 U3.2 U3.3 U3.4 U3.5 U3.6 U3.7 U3.14 U3.15 U3.16 U3.17 U3.19 U3.21 U3.22

## Polygon pours and split planes (outlines as drawn)
+5 on SIGNAL 1 "+5_L01_P005" (solid, pour order 5): 82.5,93 82.55,92.95 83.65,92.95 83.65,89.775 81,89.775 81,88.275 83,88.275 83.65,87.625 84.95,87.625 84.95,93.925 84.75,94.125 82.5,94.125 82.5,93.95
Vbus on SIGNAL 1 "VBUS_L01_P003" (solid, pour order 3): 89.275,94.1 89.25,94.125 85.625,94.125 85.625,91 86.875,91 86.875,92.625 87.825,93.575 89.3,93.575
GND on Int1 (GND) "GND_L02_P008" (solid, pour order 8): 91.7,76.6 60.141,76.6 cw(c60.141,76.941) 59.9,76.7 59.5,76.7 cw(c59.5,77.8) 58.4,77.8 58.4,108.5 cw(c59.6,108.5) 59.6,109.7 91.6,109.7 cw(c91.6,108.5) 92.8,108.5 92.8,77.6 cw(c91.7,77.6) 91.7,76.5
GND on Int1 (GND) "GND_L02_P007" (solid, pour order 7): 91.6,76.6 60.041,76.6 cw(c60.041,76.941) 59.8,76.7 59.4,76.7 cw(c59.4,77.8) 58.3,77.8 58.3,108.5 cw(c59.5,108.5) 59.5,109.7 91.5,109.7 cw(c91.5,108.5) 92.7,108.5 92.7,77.6 cw(c91.6,77.6) 91.6,76.5
GND on Int2 (GND) "GND_L03_P010" (solid, pour order 10): 91.9,76.7 60.341,76.7 cw(c60.341,77.041) 60.1,76.8 59.7,76.8 cw(c59.7,77.9) 58.6,77.9 58.6,108.6 cw(c59.8,108.6) 59.8,109.8 91.8,109.8 cw(c91.8,108.6) 93,108.6 93,77.7 cw(c91.9,77.7) 91.9,76.6

## Keep-outs
Keep-Out Layer:
  lines w0.127: 58.25,77.77 ccw(c59.52,77.77) 59.52,76.5 91.48,76.5 ccw(c91.48,77.77) 92.75,77.77 92.75,108.48 ccw(c91.48,108.48) 91.48,109.75 90.25,109.75 59.52,109.75 ccw(c59.52,108.48) 58.25,108.48 58.25,77.77

## Silkscreen, mask and mechanical layers (free items; w line width, h text height)
Top Overlay:
  text "IMU" at 62.55,106.4 h1
  text "SWD" at 73.925,98.7 h1
  text "USB" at 89.175,89.475 h1
  text "STM32" at 67.225,88.625 h1
  text "GPIO" at 67.375,82.925 h1

## Text inside footprints (layer, text, board x,y; h text height)
D1: Mechanical 13 "+" at 82.283,85.617 h0.5 r180
D2: Mechanical 13 "+" at 74.825,92.075 h0.5
J1: Mechanical 13 "PCB EDGE" at 92.5,99.65 h0.41 r90